# EAGLE board semafor-a-panel (EAGLE 9.2.2)
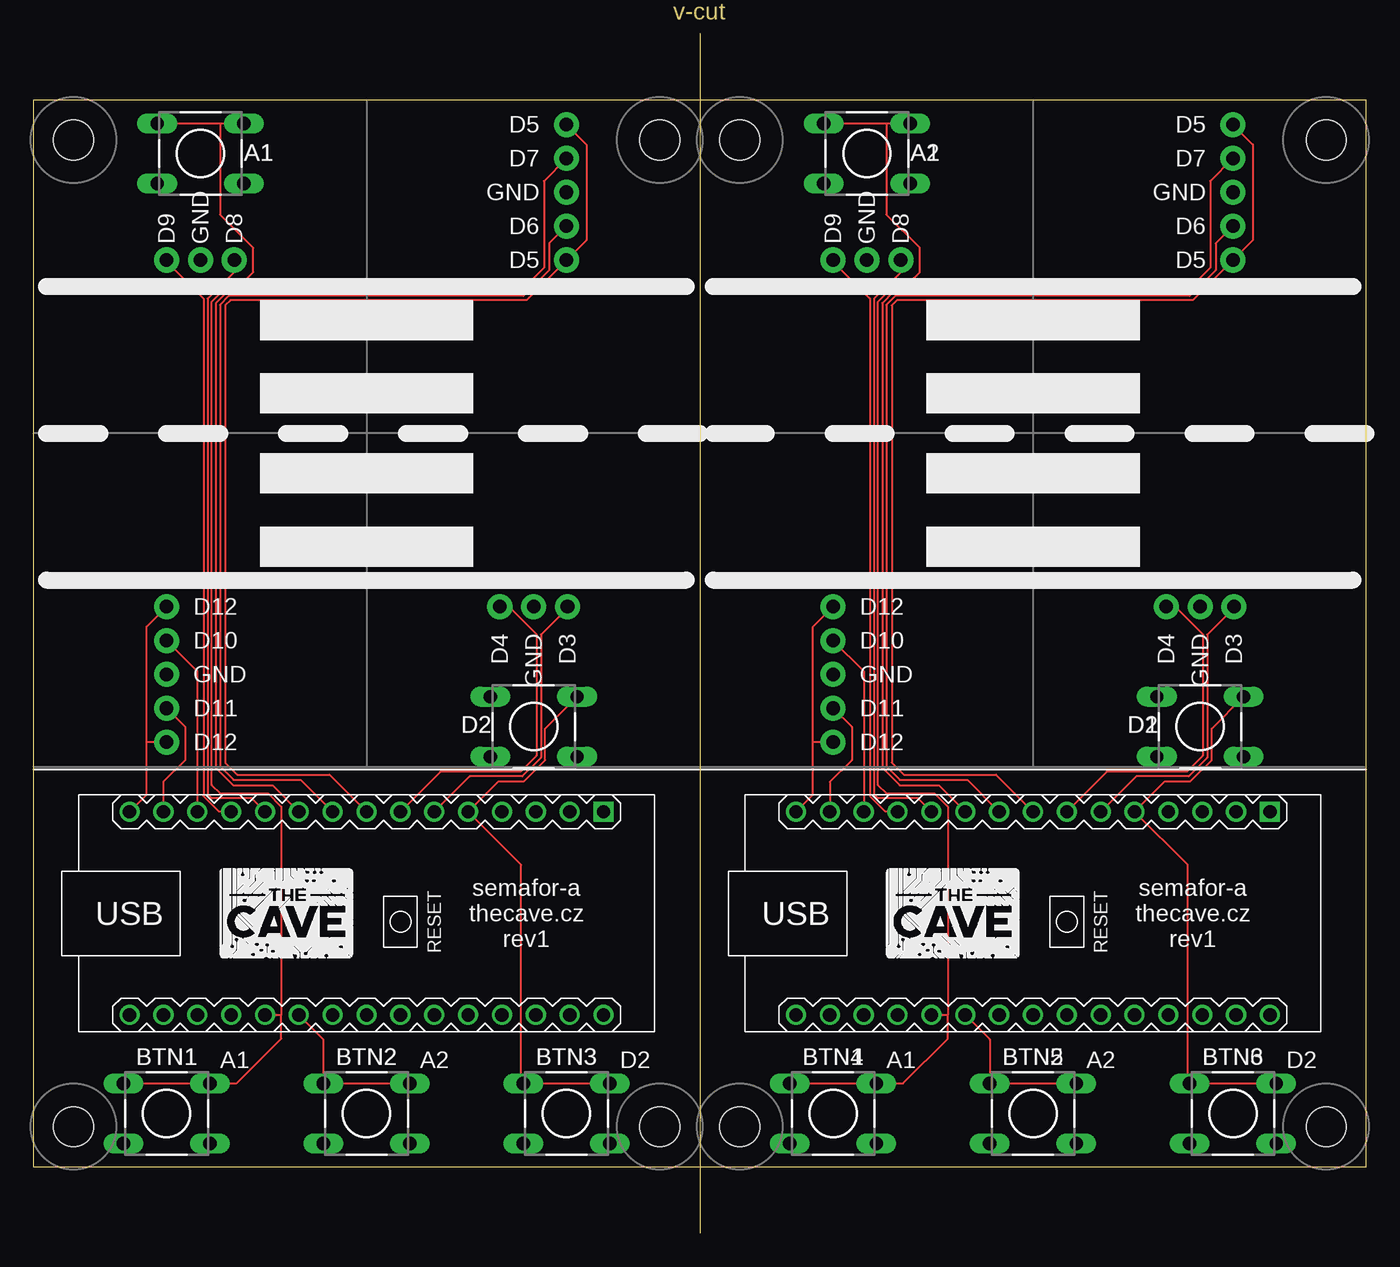
[diagram p0: board, top side]
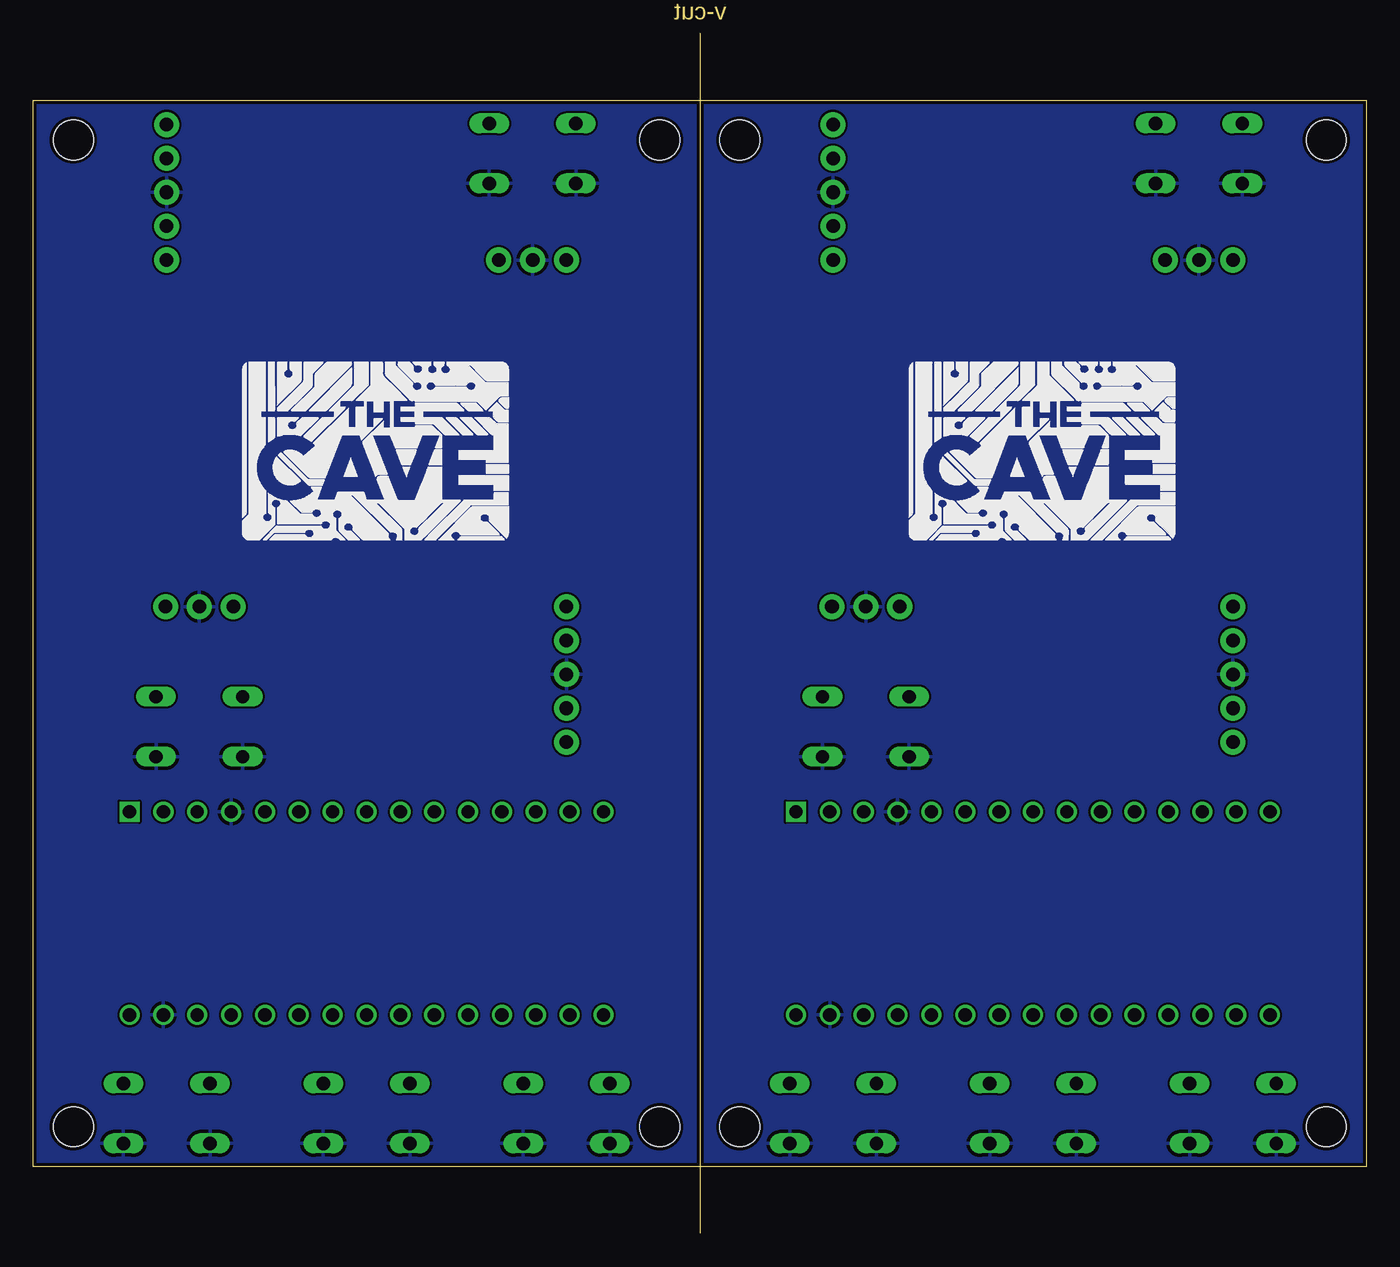
[diagram p1: board, bottom side, seen from below]

Size 100 x 90 mm. Coordinates in mm from the lower left corner, seen from the top.
Outline: 50,90 50,0
Outline: 0,85 0,5 100,5 100,85 0,85
Copper layers (1*16): Top 0.035mm / dielectric 1.5mm / Bottom 0.035mm
Design rules "SeeedStudio_2layer_DRU_no_angle_20140221": minimum track width 6mil, minimum drill 12mil, track to track 6mil, track to pad 6mil, pad to pad 6mil, via to via 6mil, smd to smd 0mil, copper to edge 10mil, drill to drill 10mil, minimum pad ring 10mil, minimum via ring 6mil, stop-mask expansion 2mil, vias tented up to drill 100mil, thermal gap 10mil
Holes 3 mm at 3,8 47,8 47,82 3,82 53,8 97,8 97,82 53,82

## Footprints (pad centres in the part's own frame; a part is rotated, then mirrored left to right if it is on the bottom)
DTS-6 = drill 1 long: 1 -3.25,2.25; 2 3.25,2.25; 3 -3.25,-2.25; 4 3.25,-2.25
1X03_NO_SILK = drill 1.016 pad 1.88: 1 0,0; 2 2.54,0; 3 5.08,0
1X05_NO_SILK = drill 1.016 pad 1.88: 1 0,0; 2 2.54,0; 3 5.08,0; 4 7.62,0; 5 10.16,0
ARDUINO-NANO-3.0 = drill 1 square: J1.1 17.78,7.62 | drill 1: J1.2 15.24,7.62; J1.3 12.7,7.62; J1.4 10.16,7.62; J1.5 7.62,7.62; J1.6 5.08,7.62; J1.7 2.54,7.62; J1.8 0,7.62; J1.9 -2.54,7.62; J1.10 -5.08,7.62; J1.11 -7.62,7.62; J1.12 -10.16,7.62; J1.13 -12.7,7.62; J1.14 -15.24,7.62; J1.15 -17.78,7.62; J2.1 17.78,-7.62; J2.2 15.24,-7.62; J2.3 12.7,-7.62; J2.4 10.16,-7.62; J2.5 7.62,-7.62; J2.6 5.08,-7.62; J2.7 2.54,-7.62; J2.8 0,-7.62; J2.9 -2.54,-7.62; J2.10 -5.08,-7.62; J2.11 -7.62,-7.62; J2.12 -10.16,-7.62; J2.13 -12.7,-7.62; J2.14 -15.24,-7.62; J2.15 -17.78,-7.62

## Placement (x,y rotation side)
A1  DTS-6  [DTS-6]  12.54,81 0 top
A2  DTS-6  [DTS-6]  62.54,81 0 top
BTN1  DTS-6  [DTS-6]  10,9 0 top
BTN2  DTS-6  [DTS-6]  25,9 0 top
BTN3  DTS-6  [DTS-6]  40,9 0 top
BTN4  DTS-6  [DTS-6]  60,9 0 top
BTN5  DTS-6  [DTS-6]  75,9 0 top
BTN6  DTS-6  [DTS-6]  90,9 0 top
D1  DTS-6  [DTS-6]  87.54,38 0 top
D2  DTS-6  [DTS-6]  37.54,38 0 top
J1  [1X03_NO_SILK]  10,73 0 top
J2  [1X03_NO_SILK]  35,47 0 top
J3  [1X05_NO_SILK]  40,73 90 top
J4  [1X05_NO_SILK]  10,47 270 top
J5  [1X03_NO_SILK]  60,73 0 top
J6  [1X03_NO_SILK]  85,47 0 top
J7  [1X05_NO_SILK]  90,73 90 top
J8  [1X05_NO_SILK]  60,47 270 top
M1  ARDUINO-NANO-3.0#NOHOLE  [ARDUINO-NANO-3.0]  25,24 0 top
M2  ARDUINO-NANO-3.0#NOHOLE  [ARDUINO-NANO-3.0]  75,24 0 top
U$1  THECAVE_LOGO_NEW_TOP_SMALL  [NEW_LOGO_SMALL_TOP]  13.98,20.67 0 top
U$2  THECAVE_LOGO_NEW_BOTTOM  [NEW_LOGO_BOTTOM]  14,52 0 top
U$3  THECAVE_LOGO_NEW_TOP_SMALL  [NEW_LOGO_SMALL_TOP]  63.98,20.67 0 top
U$4  THECAVE_LOGO_NEW_BOTTOM  [NEW_LOGO_BOTTOM]  64,52 0 top

## Library data of the parts
A1 A2 BTN1-BTN6 D1 D2 = switch-tact
J1-J8 = SparkFun-Connectors
M1 M2 U$1-U$4 = thecave

## Nets
3V1: M2.J2.14
3V3: M1.J2.14
5V: M1.J2.4
5V1: M2.J2.4
BTN1: A1.1 A1.2 BTN1.1 BTN1.2 M1.J2.11
BTN2: BTN2.1 BTN2.2 M1.J2.10
BTN3: BTN3.1 BTN3.2 D2.2 M1.J1.5
BTN4: A2.1 A2.2 BTN4.1 BTN4.2 M2.J2.11
BTN5: BTN5.1 BTN5.2 M2.J2.10
BTN6: BTN6.1 BTN6.2 D1.2 M2.J1.5
GND: A1.3 A1.4 BTN1.3 BTN1.4 BTN2.3 BTN2.4 BTN3.3 BTN3.4 D2.3 D2.4 J1.2 J2.2 J3.3 J4.3 M1.J1.4 M1.J2.2
GND1: A2.3 A2.4 BTN4.3 BTN4.4 BTN5.3 BTN5.4 BTN6.3 BTN6.4 D1.3 D1.4 J5.2 J6.2 J7.3 J8.3 M2.J1.4 M2.J2.2
P1-G: J3.4 M1.J1.10
P1-G1: J7.4 M2.J1.10
P1-R: J3.2 M1.J1.9
P1-R1: J7.2 M2.J1.9
P1-Y: J3.1 J3.5 M1.J1.8
P1-Y1: J7.1 J7.5 M2.J1.8
P2-G: J4.4 M1.J1.14
P2-G1: J8.4 M2.J1.14
P2-R: J4.2 M1.J1.13
P2-R1: J8.2 M2.J1.13
P2-Y: J4.1 J4.5 M1.J1.15
P2-Y1: J8.1 J8.5 M2.J1.15
P3-G: J2.3 M1.J1.6
P3-G1: J6.3 M2.J1.6
P3-R: J2.1 M1.J1.7
P3-R1: J6.1 M2.J1.7
P4-G: J1.3 M1.J1.11
P4-G1: J5.3 M2.J1.11
P4-R: J1.1 M1.J1.12
P4-R1: J5.1 M2.J1.12
VIN: M1.J2.1
VIN1: M2.J2.1

## Tracks (layer width: path | path; a pad name or v marks a point on that pad's centre or on a via)
BTN1
  Top 0.152: BTN1.1 BTN1.2 15.25,11.25 18.6,14.6 18.6,16.38 | A1.1 14,83.25 | 14,83.25 A1.2 | 18.6,16.38 18.6,32 17.6,33 14,33 13.38,33.61 13.38,69.89 14.8,71.3 15.7,71.3 16.5,72.1 16.5,73.9 14,76.4 14,83.25 | M1.J2.11 18.6,16.38
BTN2
  Top 0.152: BTN2.2 BTN2.1 21.75,14.55 M1.J2.10
BTN3
  Top 0.152: BTN3.2 BTN3.1 36.6,11.4 36.6,27.64 M1.J1.5 34.9,33.9 36.8,33.9 38.4,35.5 38.4,37.86 D2.2
BTN4
  Top 0.152: BTN4.1 BTN4.2 65.25,11.25 68.6,14.6 68.6,16.38 | A2.1 64,83.25 | 64,83.25 A2.2 | 68.6,16.38 68.6,32 67.6,33 64,33 63.38,33.61 63.38,69.89 64.8,71.3 65.7,71.3 66.5,72.1 66.5,73.9 64,76.4 64,83.25 | M2.J2.11 68.6,16.38
BTN5
  Top 0.152: BTN5.2 BTN5.1 71.75,14.55 M2.J2.10
BTN6
  Top 0.152: BTN6.2 BTN6.1 86.6,11.4 86.6,27.64 M2.J1.5 84.9,33.9 86.8,33.9 88.4,35.5 88.4,37.86 D1.2
GND
  pour Bottom: 0,85 50,85 50,5 0,5
GND1
  pour Bottom: 50,85 100,85 100,5 50,5
P1-G
  Top 0.152: J3.4 38.3,78.92 38.3,72.4 36.51,70.61 14.55,70.61 13.7,69.76 13.7,34.91 15,33.6 17.94,33.6 M1.J1.10
P1-G1
  Top 0.152: J7.4 88.3,78.92 88.3,72.4 86.51,70.61 64.55,70.61 63.7,69.76 63.7,34.91 65,33.6 67.94,33.6 M2.J1.10
P1-R
  Top 0.152: J3.2 38.7,74.24 38.7,72.24 36.77,70.31 14.67,70.31 14,69.63 14,35.03 15.02,34.02 20.06,34.02 M1.J1.9
P1-R1
  Top 0.152: J7.2 88.7,74.24 88.7,72.24 86.77,70.31 64.67,70.31 64,69.63 64,35.03 65.02,34.02 70.06,34.02 M2.J1.9
P1-Y
  Top 0.152: J3.5 41.5,81.66 41.5,74.5 J3.1 37,70 14.8,70 14.4,69.6 14.4,35.3 15.3,34.4 22.22,34.4 M1.J1.8
P1-Y1
  Top 0.152: J7.5 91.5,81.66 91.5,74.5 J7.1 87,70 64.8,70 64.4,69.6 64.4,35.3 65.3,34.4 72.22,34.4 M2.J1.8
P2-G
  Top 0.152: J4.4 11.4,37.98 11.4,35.5 9.76,33.86 M1.J1.14
P2-G1
  Top 0.152: J8.4 61.4,37.98 61.4,35.5 59.76,33.86 M2.J1.14
P2-R
  Top 0.152: J4.2 12.3,42.16 M1.J1.13
P2-R1
  Top 0.152: J8.2 62.3,42.16 M2.J1.13
P2-Y
  Top 0.152: M1.J1.15 8.5,32.9 8.5,36.8 | 8.5,36.8 8.5,45.5 J4.1 | J4.5 8.54,36.84 8.5,36.8
P2-Y1
  Top 0.152: M2.J1.15 58.5,32.9 58.5,36.8 | 58.5,36.8 58.5,45.5 J8.1 | J8.5 58.54,36.84 58.5,36.8
P3-G
  Top 0.152: J2.3 40.08,46.9 38.08,44.9 38.08,35.68 36.68,34.28 32.74,34.28 M1.J1.6
P3-G1
  Top 0.152: J6.3 90.08,46.9 88.08,44.9 88.08,35.68 86.68,34.28 82.74,34.28 M2.J1.6
P3-R
  Top 0.152: J2.1 35.68,47 37.74,44.94 37.74,35.82 36.54,34.62 30.54,34.62 M1.J1.7
P3-R1
  Top 0.152: J6.1 85.68,47 87.74,44.94 87.74,35.82 86.54,34.62 80.54,34.62 M2.J1.7
P4-G
  Top 0.152: M1.J1.11 16.38,32.62 13.38,32.62 13.08,32.92 13.08,70.1 15.08,72.1 J1.3
P4-G1
  Top 0.152: M2.J1.11 66.38,32.62 63.38,32.62 63.08,32.92 63.08,70.1 65.08,72.1 J5.3
P4-R
  Top 0.152: J1.1 10,72.88 12.78,70.1 12.78,32.79 13.95,31.62 M1.J1.12
P4-R1
  Top 0.152: J5.1 60,72.88 62.77,70.1 62.77,32.79 63.95,31.62 M2.J1.12

## Text on the board
Dimension: v-cut
tPlace: D5 | D5 | D7 | D7 | GND | GND | D6 | D6 | D9 | GND | D8 | D9 | GND | D8 | D5 | D5 | D12 | D12 | D4 | GND | D3 | D4 | GND | D3 | D10 | D10 | GND | GND | D11 | D11 | D12 | D12 | semafor-a / thecave.cz / rev1 | semafor-a / thecave.cz / rev1 | A1 | A2 | D2 | A1 | A2 | D2
_tNames: A1 | A1 | D2 | D2 | BTN1 | BTN2 | BTN3 | BTN1 | BTN2 | BTN3